# Altium PCB sha2017_rev1_0_0.PcbDoc (part 2 of 2)
Units mil, origin at the board's own origin, x right, y up, seen from the top; angles counter-clockwise.
Board outline 3740.16 x 3385.83 mil, 2 copper layers (Top, Bottom), stack 65.748 mil thick; 201 components, 109 nets, 510 pads, 486 vias.
Unrouted connection lines stored in the file: 20.
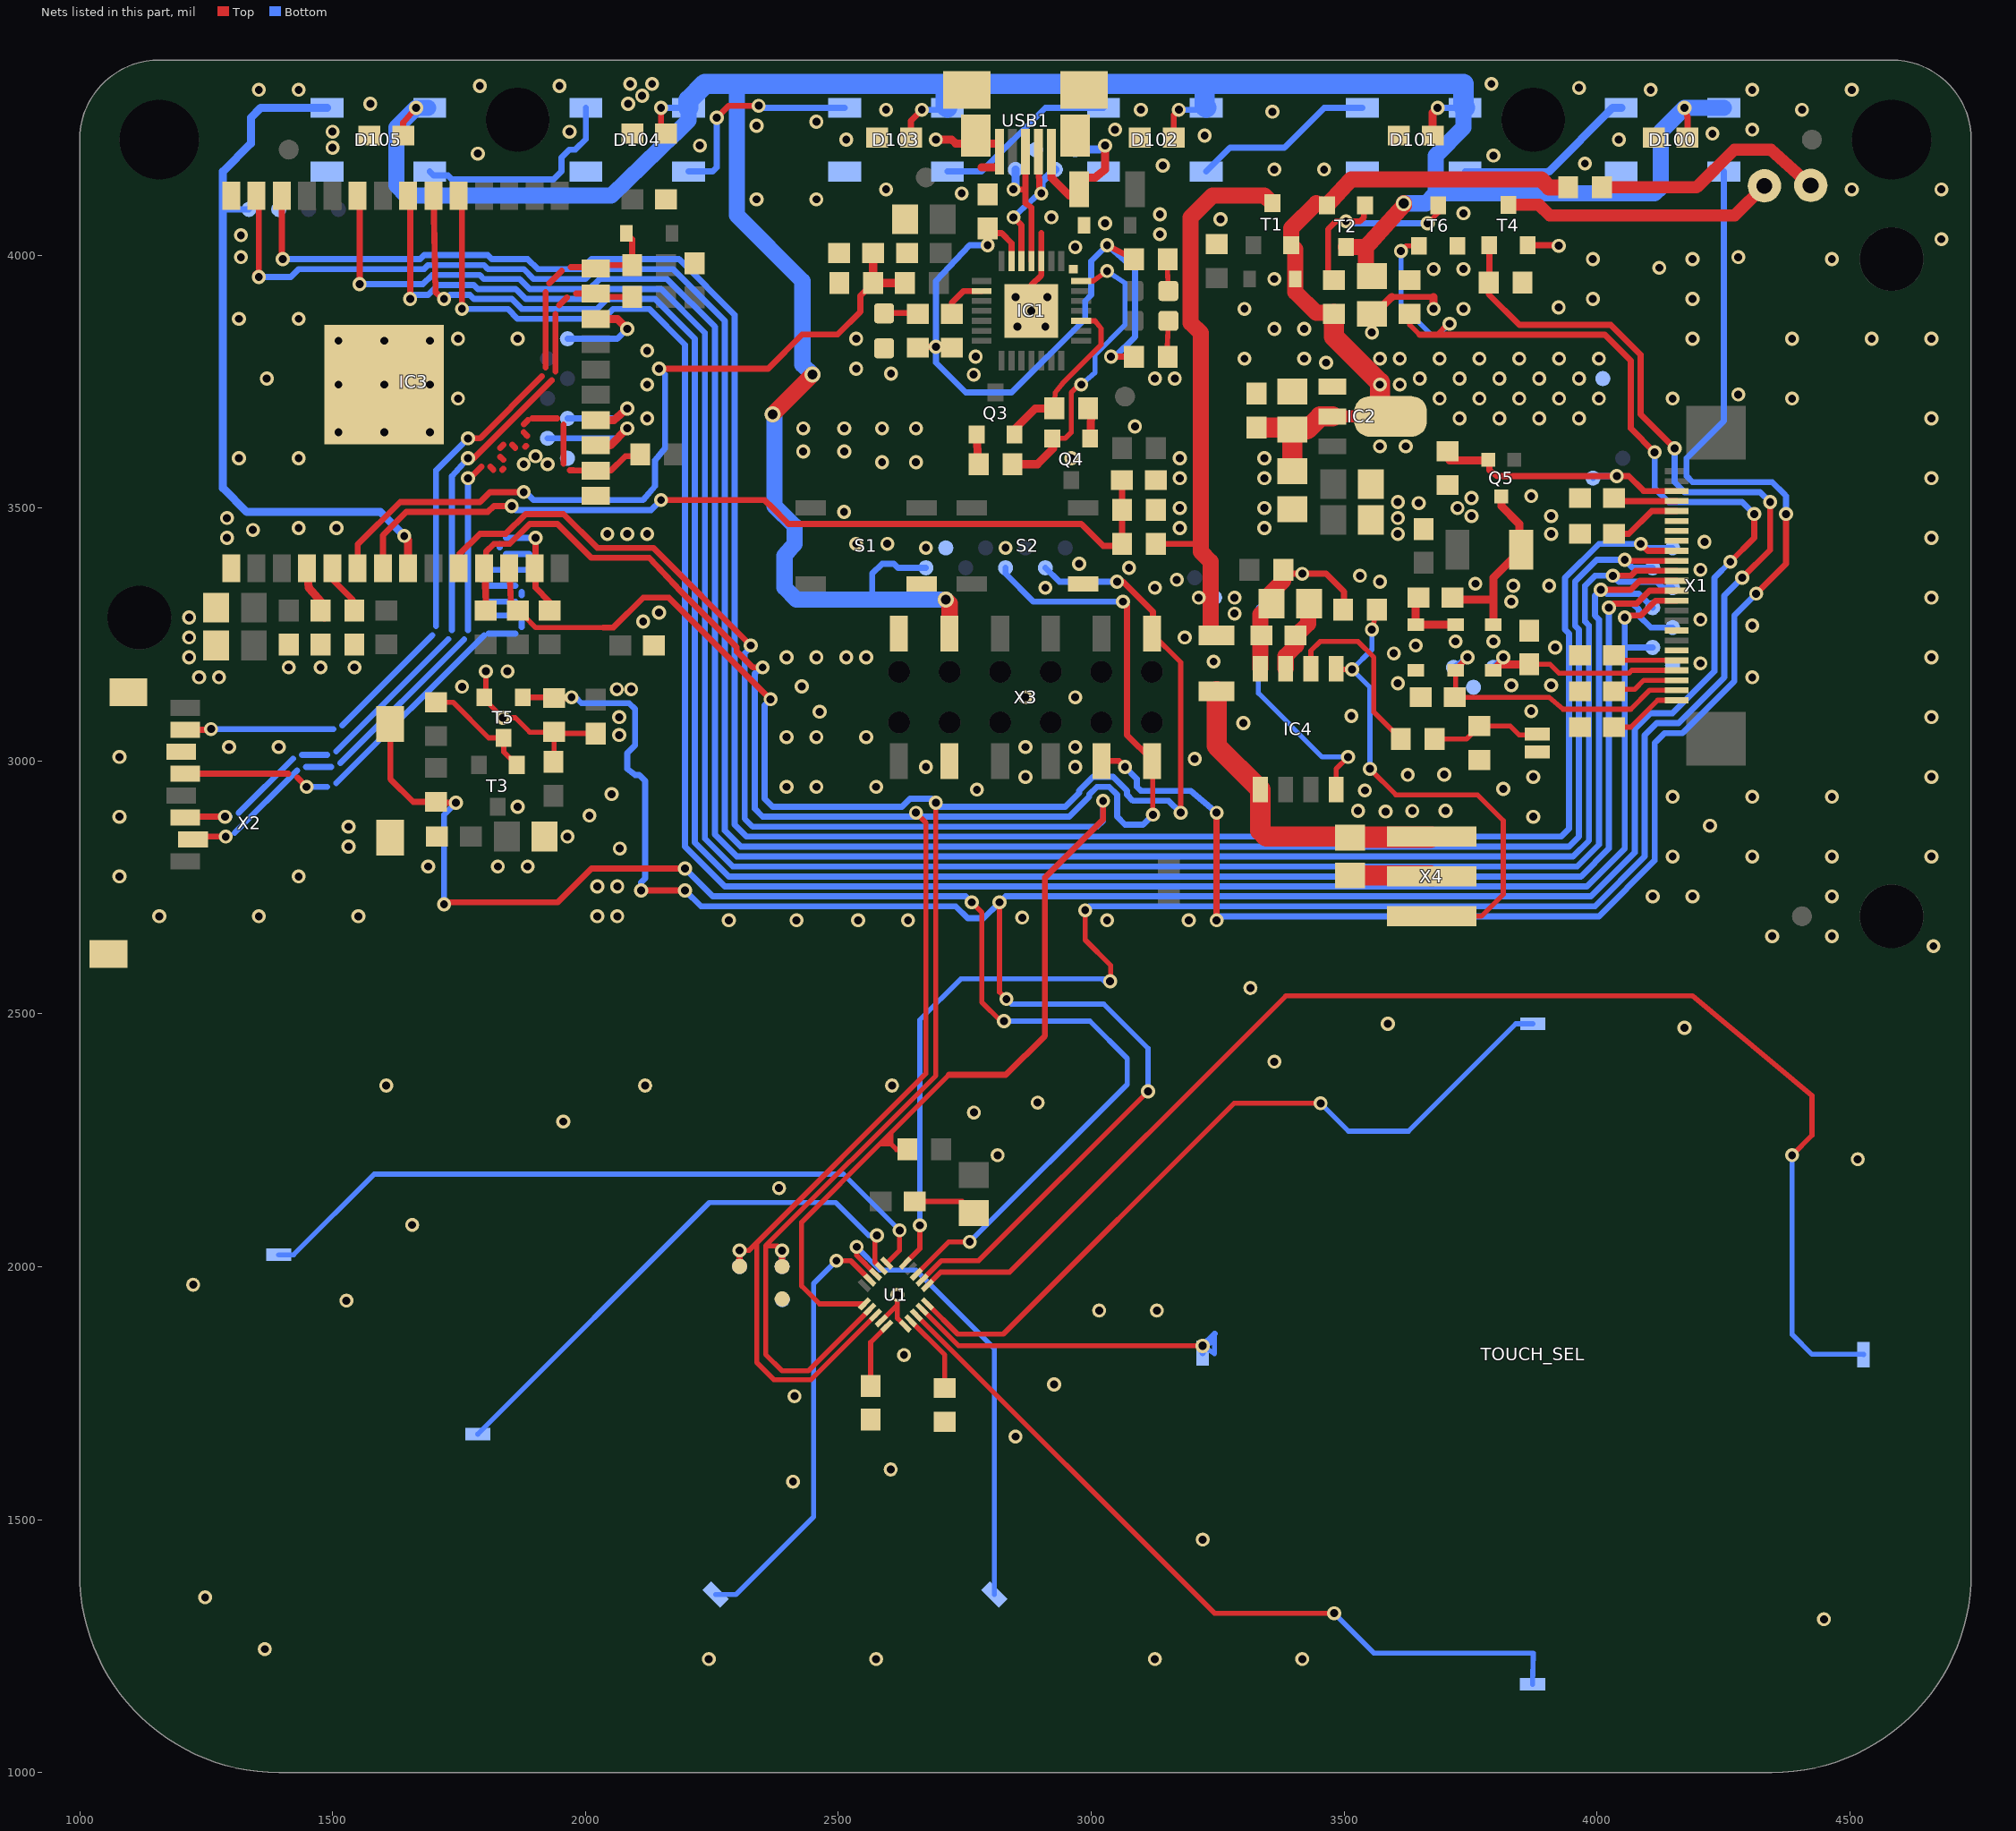
[diagram p2: the nets of this part, all layers, seen from the top]

## Via types
v1: diameter 27.75/27.75 (per signal layer), hole 15.75, Top to Bottom, 479 vias
v2: diameter 31.69/31.69 (per signal layer), hole 19.69, Top to Bottom, 7 vias

## Nets (pads, with @x,y where several pads share a name; then routed paths per layer and width w, separated by ;. In a path a pad name is that pad's centre, name@x,y a point inside that pad or via, vN(x,y) a via of type N, cw(c..) or ccw(c..) an arc to the next point about the centre after c; other vN are vias at no path point) (continued)
GND: $$U$1.P$1 $$U$2.P$1 $$U$3.P$1 $$U$4.P$1 $$U$5.P$1 $$U$6.P$1 $$U$7.P$1 $$U$8.P$1 $$U$9.P$1 C1.1 C2.1 C3.1 C4.1 C5.1 C6.1 C7.2 C8.2 C9.2 C10.2 C11.2 C12.2 C13.2 C14.2 C15.2 C16.2 C17.2 C18.2 C19.1 C20.2 C21.1 C22.2 C23.1 C24.2 C26.2 C27.2 C28.1 C29.1 C30.2 C31.2 C32.1 C33.1 C34.2 C35.1 C36.1 C37.2 C38.1 C39.2 C40.2 C41.2 C43.2 C44.2 C45.2 D1.A D6.C D7.C D100.3 D101.3 D102.3 D103.3 D104.3 D105.3 IC1.3 IC1.EXP IC1.M IC2.1 IC3.0 IC3.1 IC3.15 IC3.38 IC4.3 R4.1 R6.1 R10.2 R11.2 R19.2 R20.1 R27.1 R35.2 R37.1 S1.1 S2.1 SJ3.1 T4.2 T5.2 T6.2 TP1.P$1 TP102.P$1 TP103.P$1 TP106.P$1 TP122.P$1 TP125.P$1 TP135.P$1 TP140.P$1 U1.4 U1.6 U$2.P$1 U$3.P$1 U$4.P$1 U$5.P$1 U$6.P$1 U$10.P$1 U$11.P$1 U$12.P$1 U$13.P$1 U$14.P$1 U$15.P$1 U$16.P$1 U$17.P$1 U$18.P$1 U$19.P$1 U$20.P$1 U$21.P$1 U$22.P$1 U$23.P$1 USB1.5 USB1.GND1 USB1.GND2 USB1.GND3 USB1.GND4 X1.8 X1.17 X2.6 X2.CD2 X2.GND1 X2.GND3 X3.1@2620.08,3251.96 X3.11 X4.2 | length 1458.6
  Top w10: T5.2@1800.5,3125.62 T5.2@1803.15,3128.27 ; v1(1803.15,3177.17) T5.2@1803.15,3128.27 ; C39.2@1937.01,2998.03 1937.99,2999.02 R27.1@1937.99,3057.42 ; C37.2@2020.25,3054.38 1941.03,3054.38 R27.1@1937.99,3057.42 ; U1.4@2585.18,1893.26 2616.88,1924.96 ; $$U$9.P$1@2616.88,1944.45 2616.88,1924.96 ; U1.6@2632.55,1882.65 2616.88,1898.33 2616.88,1924.96 ; C44.2@2650.86,2129.25 2745.08,2129.25 C43.2@2768.14,2106.19 ; T5.2@1803.15,3128.27 1803.15,3119.17 v1(1836.77,3085.55) 1861.32,3085.55 1890,3056.87 1937.45,3056.87 R27.1@1937.99,3057.42
  Top w12: IC1.EXP@2881.89,3940.94 2901.57,3960.63 IC1.3@2901.57,3980.31 ; IC1.3@2901.57,3984.25 2901.57,4043.31 ; 3594.49,3917.32 3677.17,3917.32 ; T4.2@3863.25,4019.37 3923.66,4019.37 v1(3924.65,4018.39)
  Top w16: v1(2692.91,4228.35) 2724.41,4228.35 2732.28,4220.47 2818.9,4220.47 USB1.5@2818.9,4204.72 2818.9,4173.23 2783.46,4173.23 ; C13.2@3555.12,3883.86 3561.02,3883.86 3594.49,3917.32 ; v1(3677.17,3893.7) 3677.17,3917.32
  Top w32: IC4.3@3384.45,3182.48 3384.45,3207.28 3405.51,3228.35 3405.51,3246.06 C23.1@3403.54,3248.03 3405.51,3248.03 3429.13,3271.65 3429.13,3309.06 C24.2@3431.1,3311.02
  Top w40: C34.2@3511.81,2773.62 3671.26,2773.62 X4.2@3673.23,2771.65
  other v1: 2926.55,1767.34 1956.36,2286.99 3362.2,2405.51 4173.23,2472.44 3586.61,2480.31 4665.35,2633.86 4346.46,2653.54 4464.57,2653.54 2283.46,2685.04 2417.32,2685.04 2539.37,2685.04 2637.8,2685.04 3031.5,2685.04 3192.91,2685.04 2863.58,2690.23 1157.48,2692.91 1354.33,2692.91 1551.18,2692.91 2023.62,2692.91 2062.99,2692.91 4110.24,2732.28 4188.98,2732.28 4464.57,2732.28 2023.62,2751.97 2062.99,2751.97 1078.74,2771.65 1433.07,2771.65 1688.98,2791.34 1826.77,2791.34 1885.83,2791.34 4149.61,2811.02 4307.09,2811.02 4464.57,2811.02 4661.42,2811.02 2067.99,2826.95 1531.5,2830.71 1964.57,2850.39 1531.5,2870.08 4223.62,2872.05 1078.74,2889.76 3874.02,2889.76 2007.99,2891.95 3582.28,2900 3635.04,2901.18 3527.56,2901.57 3700.79,2901.57 1866.14,2909.45 4149.61,2929.13 4307.09,2929.13 4464.57,2929.13 2051.74,2934.45 3541.34,2941.73 2774.15,2943.19 3814.96,2944.88 2397.64,2948.82 2456.69,2948.82 2574.8,2948.82 2870.08,2968.5 3874.02,2968.5 4661.42,2968.5 3625.98,2972.44 3698.03,2973.23 2673.23,2988.19 2968.5,2988.19 3204.72,3003.94 1078.74,3007.87 1295.28,3027.56 1393.7,3027.56 2870.08,3027.56 2968.5,3027.56 2397.64,3047.24 2456.69,3047.24 2555.12,3047.24 2066.93,3051.18 3300.79,3074.8 2066.93,3086.61 4661.42,3086.61 3514.57,3088.98 2463.25,3097.24 3870.08,3098.43 2870.08,3125.98 2968.5,3125.98 2062.2,3141.73 2090.55,3141.73 1756.14,3146.68 2427.88,3147.23 3830.71,3149.61 3909.45,3149.61 3606.3,3153.54 1236.22,3165.35 1275.59,3165.35 4307.09,3165.35 1845.9,3177.17 1413.39,3185.04 1476.38,3185.04 1543.31,3185.04 4204.72,3192.91 3242.13,3196.46 1216.54,3204.72 2397.64,3204.72 2456.69,3204.72 2515.75,3204.72 2555.12,3204.72 4661.42,3204.72 3598.43,3212.6 3917.32,3224.41 3641.73,3228.35 3720.47,3236.22 3795.28,3236.22 1216.54,3244.09 3185.04,3244.09 4307.09,3267.72 2114.17,3275.59 4204.72,3279.53 1216.54,3283.46 3283.46,3291.34 2145.67,3293.31 3830.71,3314.96 3283.46,3322.83 4661.42,3322.83 2909.45,3342.52 3125.98,3342.52 3834.65,3346.46 3905.51,3346.46 3759.84,3350.39 3570.87,3354.33 3169.29,3358.27 3531.5,3366.14 4204.72,3377.95 3074.8,3381.89 2976.38,3389.76 2673.23,3421.26 2830.71,3421.26 2535.43,3429.13 2597,3429.39 4212.6,3433.07 1291.34,3440.94 4661.42,3440.94 2043.31,3448.82 2082.68,3448.82 2122.05,3448.82 3606.3,3448.82 3909.45,3448.82 1342.52,3456.69 1433.07,3460.63 1507.87,3460.63 3175.2,3460.63 3342.52,3460.63 1291.34,3480.31 3606.3,3480.31 3751.97,3484.25 3909.45,3484.25 2511.38,3492.51 3175.2,3500 3342.52,3500 3724.41,3500 3647.64,3509.84 3606.3,3511.81 3751.97,3519.69 3870.08,3523.62 3175.2,3559.06 3342.52,3559.06 4661.42,3559.06 1877.95,3586.61 1925.2,3586.61 2586.61,3590.55 2653.54,3590.55 1314.96,3598.43 1433.07,3598.43 2960.63,3598.43 3175.2,3598.43 3342.52,3598.43 1901.57,3602.36 2430.76,3611.8 2511.81,3611.8 1511.81,3649.61 1602.36,3649.61 1692.91,3649.61 2430.76,3657.48 2511.81,3657.48 2586.61,3657.48 2653.54,3657.48 3086.61,3661.42 2122.05,3677.17 4661.42,3677.17 1748.03,3716.54 4149.61,3716.54 4385.83,3716.54 4279.53,3724.41 1511.81,3744.09 1602.36,3744.09 1692.91,3744.09 2122.05,3744.09 1370.08,3755.91 3125.98,3755.91 3165.35,3755.91 2767.72,3763.78 2604.33,3765.75 2535.43,3775.59 3464.57,3787.4 3303.15,3795.28 3421.26,3795.28 2771.65,3799.21 2122.05,3811.02 1511.81,3830.71 1602.36,3830.71 1692.91,3830.71 1748.03,3834.65 1866.14,3834.65 2535.43,3834.65 4188.98,3834.65 4385.83,3834.65 4543.31,3834.65 4661.42,3834.65 3555.12,3847.24 3362.2,3854.33 3421.26,3854.33 2854.33,3858.27 2909.45,3858.27 1314.96,3874.02 1433.07,3874.02 2881.89,3889.76 3303.15,3893.7 3736.22,3893.7 3924.32,3896.51 3992.13,3913.39 4188.98,3913.39 2850.39,3917.32 2913.39,3917.32 3362.2,3952.76 3677.17,3972.44 3736.22,3972.44 4123.4,3974.94 3992.13,3992.13 4188.98,3992.13 4464.57,3992.13 1318.9,3996.06 4279.53,3996.06 2968.5,4015.75 4681.1,4031.5 1318.9,4039.37 3135.83,4041.34 3027.56,4062.99 3255.91,4070.87 2921.26,4074.8 3135.83,4080.71 3736.22,4082.68 2338.58,4110.24 2456.69,4110.24 2744.09,4122.05 2594.49,4129.92 4503.94,4129.92 4681.1,4129.92 3362.2,4169.29 3460.63,4169.29 3141.73,4177.17 3976.38,4181.1 3795.28,4196.85 1787.4,4200.79 1500,4212.6 2226.38,4216.54 2515.75,4228.35 4043.31,4228.35 3224.41,4236.22 4228.35,4240.16 1500,4244.09 1968.5,4244.09 3047.24,4248.03 4307.09,4248.03 2338.58,4255.91 2456.69,4263.78 3358.27,4283.46 2594.49,4287.4 3098.43,4287.4 4405.51,4287.4 1574.8,4299.21 2084.65,4299.21 2112.2,4314.96 1354.33,4326.77 1433.07,4326.77 4106.3,4326.77 4307.09,4326.77 4503.94,4326.77 3964.57,4330.71 1791.34,4334.65 1948.82,4334.65 2088.58,4338.58 2131.89,4338.58 3791.34,4338.58
I2C_INT: IC3.10 R1.1 U1.1 | length 3356.3
  Top w10: U1.1@2551.95,1926.5 2462.87,1926.5 2427.5,1961.87 2427.5,2088.12 2582.5,2243.12 ; 2603.75,2244.37 2603.75,2264.37 ; R1.1@2636.54,2231.87 2615,2231.87 2603.75,2243.12 ; 2718.75,2379.37 2603.75,2264.37 ; 2582.5,2243.12 2593.13,2253.75 ; 2582.5,2243.12 2603.75,2243.12 ; 2593.13,2253.75 2603.75,2264.37 ; 2593.13,2253.75 2603.75,2243.12
  Top w12: IC3.10@1749.6,3381.1 1749.61,3407.09 1791.34,3448.82 1842.52,3448.82 1881.89,3488.19 1956.69,3488.19 2023.62,3421.26 2133.86,3421.26 v1(2326.77,3228.35) ; 2718.75,2379.37 2831.25,2379.37 2908.75,2456.87 2908.75,2769.5 3023.62,2884.37 v1(3023.62,2921.26)
  Bottom w12: v1(2326.77,3228.35) 2326.77,3224.41 2314.96,3212.6 2314.96,2885.83 2330.71,2870.08 3011.81,2870.08 3023.62,2881.89 v1(3023.62,2921.26)
I2C_SCL: IC3.12 R24.2 TP3.P$1 TP100.P$1 TP114.P$1 U1.2 X3.6 | length 4122.9
  Top w10: R24.2@1879.92,3285.43 1901.57,3263.78 2035.43,3263.78 ; v1(2388.86,2031.98) 2379.55,2041.29 2356.25,2041.29 ; U1.2@2562.55,1915.89 2441.03,1794.37 2388.75,1794.37 2356.25,1826.87 2356.25,2041.29 ; v1(2692.91,2917.32) 2692.91,2377.95 2356.25,2041.29 ; X3.6@3120.08,3251.96 3177.17,3194.88 v1(3177.17,2897.64)
  Top w12: IC3.12@1849.6,3381.1 1853.54,3294.09 R24.2@1866.14,3297.24 1879.92,3311.02 R24.2@1879.92,3285.43 ; 2035.43,3263.78 2055.12,3263.78 2114.17,3322.83 2165.35,3322.83 v1(2366.14,3122.05) ; TP3.P$1@2388.86,2000.48 v1(2388.86,2031.98) ; v1(3051.18,3354.33) 3062.99,3354.33 3122.05,3295.28 3122.05,3253.94 X3.6@3120.08,3251.96
  Bottom w12: v1(2366.14,3122.05) 2354.33,3110.24 2354.33,2925.2 2370.08,2909.45 2625.98,2909.45 2641.73,2925.2 2685.04,2925.2 v1(2692.91,2917.32) 2700.79,2909.45 2948.82,2909.45 2976.38,2937.01 2976.38,2940.94 3003.94,2968.5 3043.31,2968.5 3070.87,2940.94 3070.87,2933.07 3082.68,2921.26 3153.54,2921.26 v1(3177.17,2897.64) ; TP100.P$1@2388.86,2000.48 v1(2388.86,2031.98) ; TP114.P$1@2909.45,3381.89 2937.01,3354.33 v1(3051.18,3354.33)
I2C_SDA: IC3.11 R23.2 TP2.P$1 TP101.P$1 TP115.P$1 U1.3 X3.7 | length 4439.2
  Top w10: v1(2304.88,2032.25) 2323.59,2032.25 2338.75,2047.41 ; U1.3@2573.86,1904.57 2446.16,1776.87 2372.5,1776.87 2338.75,1810.62 2338.75,2047.41 ; v1(2653.54,2897.64) 2673.23,2877.95 2673.23,2381.89 2338.75,2047.41 ; X3.7@3120.08,3000 3122.05,2998.03 v1(3122.05,2893.7)
  Top w12: IC3.11@1799.6,3381.1 R23.2@1803.54,3297.64 ; R23.2@1803.15,3297.24 R23.2@1803.54,3297.64 ; IC3.11@1803.15,3397.64 IC3.11@1803.54,3397.24 ; TP2.P$1@2304.88,2000.76 v1(2304.88,2032.25) ; v1(2350.39,3185.04) 2330.71,3185.04 2299.21,3216.54 2299.21,3224.41 2188.98,3334.65 2125.98,3401.57 2011.81,3401.57 1944.88,3468.5 1889.76,3468.5 1850.39,3429.13 1818.9,3429.13 1803.54,3413.78 IC3.11@1803.54,3397.24 ; v1(3062.99,3314.96) 3070.87,3307.09 3070.87,3051.18 3120.08,3001.97 X3.7@3120.08,3000 ; R23.2@1803.54,3297.64 IC3.11@1803.54,3397.24
  Bottom w12: TP101.P$1@2304.88,2000.76 v1(2304.88,2032.25) ; v1(2350.39,3185.04) 2346.46,3185.04 2334.65,3173.23 2334.65,2905.51 2350.39,2889.76 2641.73,2889.76 ; v1(2653.54,2897.64) 2649.61,2897.64 2641.73,2889.76 ; TP115.P$1@2830.71,3381.89 2830.71,3370.08 2885.83,3314.96 v1(3062.99,3314.96) ; v1@3118.11,2889.76 v1(3122.05,2893.7) 3102.36,2874.02 3066.93,2874.02 3051.18,2889.76 3051.18,2933.07 3035.43,2948.82 3011.81,2948.82 2996.06,2933.07 2996.06,2929.13 2956.69,2889.76 2641.73,2889.76
LCD_!RESET: IC3.37 TP113.P$1 X1.15 | length 4671
  Top w12: IC3.37@1349.6,4117.32 1354.33,4112.6 v1(1354.33,3956.69) v1@1353.54,3957.48 ; v1(4055.12,3397.64) 4055.12,3395.67 X1.15@4157.48,3395.67
  Top w16: v1@1349.61,3961.42 v1(1354.33,3956.69)
  Bottom w12: v1(1354.33,3956.69) 1417.32,3956.69 1433.07,3972.44 1681.1,3972.44 1688.98,3980.31 1799.21,3980.31 1807.09,3972.44 1877.95,3972.44 1897.64,3952.76 2000,3952.76 2019.69,3972.44 2173.23,3972.44 2267.72,3877.95 2275.59,3870.08 2275.59,3854.33 2275.59,2862.2 2307.09,2830.71 3944.88,2830.71 3964.57,2850.39 3964.57,3259.84 3956.69,3267.72 3956.69,3354.33 4000,3397.64 v1(4055.12,3397.64) 4070.87,3381.89 TP113.P$1@4110.24,3381.89
LCD_BUSY: IC3.36 TP118.P$1 X1.16 | length 4601
  Top w12: v1@1399.61,3994.09 IC3.36@1399.6,4117.32 ; v1(1401.57,3992.13) v1@1403.54,3990.16 ; 4098.43,3417.32 v1(4086.61,3429.13) 4100.39,3415.35 X1.16@4157.48,3415.36
  Top w16: v1@1399.61,3994.09 v1(1401.57,3992.13)
  Bottom w12: v1(1401.57,3992.13) 1673.23,3992.13 1681.1,4000 1807.09,4000 1814.96,3992.13 1885.83,3992.13 1905.51,3972.44 1992.13,3972.44 2011.81,3992.13 2185.04,3992.13 2295.28,3881.89 2295.28,2874.02 2318.9,2850.39 3929.13,2850.39 3944.88,2866.14 3944.88,3251.97 3937.01,3259.84 3937.01,3362.2 4003.94,3429.13 v1(4086.61,3429.13) 4094.49,3421.26 TP118.P$1@4149.61,3421.26
LCD_CS: IC3.31 TP109.P$1 X1.13 | length 4456.7
  Top w12: IC3.31@1649.6,4117.32 1653.54,4113.39 v1(1653.54,3913.39) ; v1(4007.87,3338.58) 4066.93,3338.58 4084.65,3356.3 4086.61,3356.3 X1.13@4157.48,3356.3
  Bottom w12: v1(1653.54,3913.39) 1661.42,3921.26 1688.98,3921.26 1708.66,3940.94 1779.53,3940.94 1787.4,3933.07 1862.2,3933.07 1881.89,3913.39 2015.75,3913.39 2035.43,3933.07 2149.61,3933.07 2236.22,3846.46 2236.22,2846.46 2291.34,2791.34 3960.63,2791.34 4003.94,2834.65 4003.94,3279.53 3996.06,3287.4 3996.06,3326.77 v1(4007.87,3338.58) ; TP109.P$1@4110.24,3303.15 4094.49,3318.9 4082.68,3330.71 4019.69,3330.71 v1(4007.87,3338.58) ; v1(4007.87,3338.58) 4007.87,3342.52 v1(4007.87,3338.58)
LCD_D/!S: IC3.33 TP111.P$1 X1.14 | length 4536.7
  Top w12: IC3.33@1549.6,4117.32 1553.54,4113.39 v1(1553.54,3942.52) ; v1(4031.5,3366.14) 4066.93,3366.14 4076.77,3375.98 4078.74,3375.98 X1.14@4157.48,3375.99
  Bottom w12: v1(1553.54,3942.52) 1678.74,3942.52 1696.85,3960.63 1791.34,3960.63 1799.21,3952.76 1870.08,3952.76 1889.76,3933.07 2007.87,3933.07 2027.56,3952.76 2161.42,3952.76 2255.91,3858.27 2255.91,2854.33 2299.21,2811.02 3952.76,2811.02 3984.25,2842.52 3984.25,3267.72 3976.38,3275.59 3976.38,3346.46 3996.06,3366.14 v1(4031.5,3366.14) 4043.31,3354.33 4118.11,3354.33 4129.92,3342.52 TP111.P$1@4149.61,3342.52
LCD_MOSI: IC3.29 TP107.P$1 X1.11 | length 4257.5
  Top w12: IC3.29@1749.6,4117.32 1755.91,4111.02 v1(1755.91,3893.7) v1@1753.54,3896.06 ; v1(4055.12,3283.46) 4062.99,3287.4 4086.61,3287.4 4116.14,3316.93 4118.11,3316.93 X1.11@4157.48,3316.93
  Bottom w12: v1(1755.91,3893.7) 1846.46,3893.7 1866.14,3874.02 1870.08,3874.02 2035.43,3874.02 2055.12,3893.7 2125.98,3893.7 2196.85,3822.83 2196.85,2830.71 2275.59,2751.97 3980.32,2751.97 4055.12,2826.77 4055.12,3224.41 ; v1(4055.12,3283.46) 4055.12,3224.41 ; TP107.P$1@4110.24,3224.41 4055.12,3224.41
LCD_SCK: IC3.30 TP108.P$1 X1.12 | length 4396.7
  Top w12: IC3.30@1699.6,4117.32 1703.54,3926.38 v1(1720.47,3913.39) ; v1(4023.62,3303.15) 4031.5,3311.02 4078.74,3311.02 4104.33,3336.61 X1.12@4157.48,3336.62
  Bottom w12: v1(1720.47,3913.39) 1728.35,3917.32 1732.28,3921.26 1771.65,3921.26 1779.53,3913.39 1854.33,3913.39 1874.02,3893.7 1881.89,3893.7 2023.62,3893.7 2043.31,3913.39 2137.8,3913.39 2216.54,3834.65 2216.54,2838.58 2283.46,2771.65 3968.5,2771.65 4023.62,2826.77 v1(4023.62,3303.15) 4031.5,3311.02 4070.87,3311.02 4082.68,3299.21 4082.68,3287.4 4106.3,3263.78 TP108.P$1@4149.61,3263.78
N$1: TOUCH_A.P$1 U1.16 | length 1415
  Top w10: U1.16@2595.79,2007.11 2621.25,2032.57 v1(2621.25,2071.87)
  Bottom w10: TOUCH_A.P$1@1393.7,2023.62 1423,2023.62 1582.5,2183.12 2510,2183.12 v1(2621.25,2071.87)
N$2: D100.4 D101.2 | length 361.1
  Bottom w12: D101.2@3739.25,4165.35 3905.51,4165.35
  Bottom w16: 3905.51,4165.35 4031.5,4291.34 D100.4@4048.15,4291.34
N$3: D103.4 D104.2 | length 424.3
  Top w12: v1(2259.84,4271.65) 2283.46,4295.28 v1(2342.52,4295.28)
  Bottom w12: D104.2@2203.82,4165.36 2251.97,4165.35 2259.84,4173.23 v1(2259.84,4271.65) ; v1(2342.52,4295.28) 2342.52,4291.34 D103.4@2512.71,4291.34
N$4: D104.4 D105.2 | length 426.6
  Bottom w12: D105.2@1692.01,4165.36 1699.88,4157.48 1728.35,4157.48 1736.22,4149.61 1755.91,4149.61 1937.01,4149.61 1952.76,4165.35 1952.76,4192.91 1968.5,4208.66 1980.32,4208.66 2000.91,4229.25 D104.4@2000.9,4291.34
N$5: 
N$6: TOUCH_START.P$1 U1.19 | length 864.4
  Top w10: v1(2496.25,2011.87) 2524.56,2011.87 U1.19@2562.55,1973.87
  Bottom w10: TOUCH_START.P$1@2257.45,1351.94 2297.57,1351.94 2451.25,1505.62 2451.25,1966.87 v1(2496.25,2011.87)
N$7: IC4.2 R29.1 | length 364.1
  Top w10: IC4.2@3434.45,3182.48 3434.45,3217.91 3452.76,3236.22 3527.56,3236.22 3559.06,3204.72 3559.06,3096.46 R29.1@3612.21,3043.31
N$8: IC1.9 R13.2 | length 90.5
  Top w12: R13.2@2724.41,3883.86 2724.41,3905.51 2748.03,3929.13 IC1.9@2783.46,3929.13
N$9: R29.2 R35.1 SJ3.2 | length 221.5
  Top w10: R29.2@3679.13,3043.31 3742.13,3043.31 R35.1@3767.72,3068.89 3828.74,3068.9 3846.46,3051.18 3879.92,3051.18 SJ3.2@3881.89,3053.15
N$10: IC1.24 Q3.2 R15.1 | length 346.4
  Top w10: R15.1@2927.17,3696.85 2929.13,3728.35 2944.88,3748.03 3019.69,3822.83 3019.69,3854.33 3007.87,3870.08 IC1.24@2980.32,3870.07
  Top w16: Q3.2@2848.42,3645.67 2850.39,3657.48 2889.76,3696.85 R15.1@2927.17,3696.85
N$11: IC1.28 Q4.2 R18.1 | length 598.8
  Top w10: Q4.2@2923.23,3637.8 2948.82,3637.8 2960.63,3649.61 2960.63,3728.35 2976.38,3744.09 v1(2980.32,3744.09) ; IC1.28@2980.32,3948.82 3003.94,3948.82 v1(3031.5,3968.5)
  Top w16: R18.1@2844.48,3586.61 2893.7,3586.61 2925.2,3618.11 Q4.2@2923.23,3637.8
  Bottom w10: v1(2980.32,3744.09) 3007.87,3767.72 3007.87,3803.15 3066.93,3862.2 3066.93,3944.88 v1(3031.5,3968.5)
N$12: C23.2 C24.1 IC4.4 IC4.8 R30.2 R32.2 | length 1019.9
  Top w10: R30.2@3379.92,3377.95 3387.8,3370.08 v1(3417.32,3370.08) ; IC4.8@3484.45,2943.5 3484.45,2984.45 v1(3507.87,3007.87)
  Top w12: R30.2@3381.89,3370.08 v1(3417.32,3370.08) 3464.57,3370.08 3500,3334.65 3500,3301.18 R32.2@3498.04,3299.21
  Top w32: IC4.4@3334.45,3182.48 3334.65,3182.68 C23.2@3334.65,3244.09 ; C23.2@3336.62,3248.03 C23.2@3334.65,3244.09 ; R30.2@3379.92,3377.95 R30.2@3379.92,3368.11 ; R30.2@3381.89,3370.08 R30.2@3379.92,3368.11 ; C23.2@3334.65,3244.09 3334.65,3289.37 C24.1@3356.3,3311.02 3354.33,3312.99 3354.33,3330.71 3379.92,3356.3 R30.2@3379.92,3368.11
  Bottom w10: v1(3417.32,3370.08) 3397.64,3370.08 3330.71,3303.15 3330.71,3133.86 3456.69,3007.87 v1(3507.87,3007.87)
N$13: Q4.1 R15.2 | length 60.5
  Top w16: R15.2@2994.09,3696.85 3000,3685.04 Q4.1@2998.03,3637.8
N$14: Q3.1 R18.2 | length 59.2
  Top w16: Q3.1@2773.62,3645.67 2775.59,3610.24 R18.2@2777.56,3586.61
N$16: M1.- T4.1 | length 538.5
  Top w24: T4.1@3825.25,4099.37 3885.62,4099.37 3906.25,4078.74 4272.83,4078.74 M1.-@4331.1,4137
N$17: R28.1 T3.1 T5.1 | length 227.1
  Top w10: R28.1@1704.72,3116.14 1738.23,3116.14 1808.75,3045.62 T5.1@1838.5,3045.62 1838.5,3017.8 T3.1@1864.17,2992.13
N$18: M1.+ R2.1 | length 471.2
  Top w24: R2.1@4009.84,4133.86 4196.85,4133.86 4271.65,4208.66 4344.09,4208.66 M1.+@4422.83,4137.79
N$19: D101.4 D102.2 | length 361.1
  Bottom w12: D102.2@3227.44,4165.36 3274.69,4212.6 3381.89,4212.6 3460.63,4291.34 D101.4@3536.34,4291.34
N$20: C45.1 U1.5 | length 131.4
  Top w10: C45.1@2563.92,1764.41 2563.92,1850.79 U1.5@2595.79,1882.65
N$21: R37.2 U1.7 | length 160.8
  Top w10: U1.7@2643.16,1893.26 2710.58,1825.85 R37.2@2710.58,1760.39
N$22: C25.1 D7.A D8.C | length 112.2
  Top w16: C25.1@3641.73,3303.15 3641.73,3271.65 D7.A@3641.73,3269.69 D8.C@3720.47,3269.69
N$23: C25.2 D9.A L1.2 Q5.3 | length 373.5
  Top w16: C25.2@3714.56,3322.83 3724.41,3318.9 3795.28,3318.9 ; D9.A@3795.28,3269.69 3795.28,3318.9 ; Q5.3@3811.02,3522.64 3811.02,3503.94 3846.46,3468.5 3846.46,3421.26 L1.2@3850.39,3417.32 3795.28,3362.2 3795.28,3318.9
N$24: TOUCH_B.P$1 U1.17 | length 1077.5
  Top w10: v1(2576.25,2061.87) 2572.5,2058.12 2572.5,2009.18 U1.17@2585.18,1996.5
  Bottom w10: TOUCH_B.P$1@1787.4,1669.29 2244.98,2126.87 2495,2126.87 2560,2061.87 v1(2576.25,2061.87)
N$25: TOUCH_SEL.L U1.11 | length 2715.7
  Top w10: U1.11@2676.4,1963.26 2702.5,1989.37 2838.75,1989.37 3384.81,2535.43 3570,2535.43 ; 3559.06,2535.43 3570,2535.43 ; v1(4385.83,2220.47) 4425.2,2259.84 4425.2,2338.58 4188.98,2535.43 3570,2535.43
  Bottom w10: v1(4385.83,2220.47) 4385.83,1866.14 4425.2,1826.77 4527.56,1826.77 TOUCH_SEL.L@4527.17,1825.98
N$26: D6.A R12.1 | length 75.3
  Top w10: R12.1@2657.48,3883.86 R12.1@2661.42,3885.83
  Top w12: D6.A@2590.55,3884.92 R12.1@2661.42,3885.83
N$27: D4.A R3.1 | length 71.4
  Top w10: R3.1@3151.57,3992.13 3149.61,3996.06 D4.A@3152.64,3929.13
N$28: D5.A R14.1 | length 72.9
  Top w10: R14.1@3151.57,3799.21 3149.61,3799.21 D5.A@3152.64,3870.08
N$29: 
N$30: 
N$31: 
N$32: F1.1 TP139.P$1 USB1.1 | length 308.7
  Top w16: USB1.1@2921.26,4204.72 2921.26,4153.54 2956.69,4118.11 F1.1@2976.38,4129.92 2984.25,4137.8 2984.25,4153.54 3007.87,4153.54 3027.56,4169.29 v1(3027.56,4216.54)
  Bottom w16: TP139.P$1@2968.5,4208.66 3015.75,4208.66 v1(3027.56,4216.54)
N$33: 
N$34: 
N$35: 
N$36: 
N$37: 
N$38: 
N$39: 
N$40: 
N$41: 
N$42: C28.2 IC3.4 | length 109.7
  Top w16: IC3.4@1449.6,3381.1 1452.76,3342.52 1484.25,3307.09 C28.2@1484.25,3283.46
N$43: C29.2 IC3.5 | length 102
  Top w12: IC3.5@1499.6,3381.1 1499.61,3358.66 1539.37,3318.9 1539.37,3301.18 C29.2@1543.31,3297.24
N$44: TOUCH_SEL.D U1.8 | length 1558.2
  Top w10: U1.8@2654.48,1904.57 3244.09,1314.96 v1(3480.32,1314.96)
  Bottom w10: v1(3480.32,1314.96) 3559.06,1236.22 3874.02,1236.22 TOUCH_SEL.D@3872.84,1174.41
N$46: TOUCH_SELECT.P$1 U1.18 | length 911.8
  Top w10: v1(2536.25,2039.37) 2536.25,2022.8 U1.18@2573.86,1985.19
  Bottom w10: v1(2536.25,2039.37) 2582.5,1993.12 2653.75,1993.12 2808.64,1838.23 TOUCH_SELECT.P$1@2808.63,1351.94
N$47: TOUCH_SEL.UP U1.10 | length 1521.2
  Top w10: U1.10@2676.4,1926.5 2736.03,1866.87 2826.25,1866.87 3282.5,2323.12 v1(3453.75,2323.12)
  Bottom w10: v1(3453.75,2323.12) 3508.75,2268.12 3627.5,2268.12 3839.69,2480.31 TOUCH_SEL.UP@3873.23,2480.31
N$49: C34.1 F2.1 IC4.5 X4.3 | length 817.2
  Top w40: F2.1@3248.03,3137.79 3248.03,3029.92 IC4.5@3334.45,2943.5 3334.45,2862.4 3346.46,2850.39 X4.3@3673.23,2850.39 3671.26,2848.43 C34.1@3511.81,2848.42
N$50: D102.4 D103.2 | length 361.1
  Bottom w12: D103.2@2715.63,4165.36 2783.46,4165.35 2909.45,4291.34 D102.4@3024.52,4291.34
N$53: R9.1 T2.1 T6.1 | length 428.6
  Top w10: v1(3665.35,4062.99) 3686.5,4084.14 T6.1@3686.5,4098.12
  Top w12: R9.1@3474.41,3956.69 R9.1@3480.32,3950.78 3468.5,3966.54 3468.5,4051.18 3484.25,4066.93 v1(3503.94,4066.93) 3531.5,4066.93 3539.37,4074.8 3539.37,4100.39 T2.1@3541.34,4098.43
  Bottom w12: v1(3503.94,4066.93) 3507.87,4062.99 v1(3665.35,4062.99)
N$56: TOUCH_SEL.R U1.9 | length 725.5
  Top w10: U1.9@2665.79,1915.89 2737.59,1844.09 v1(3220.47,1844.09)
  Bottom w10: 3244.09,1867.72 3244.09,1852.76 ; 3244.09,1852.76 v1(3220.47,1843.21) 3240.16,1830.71 3244.09,1828.35 3244.09,1852.76
  Bottom w12: TOUCH_SEL.R@3220.48,1829.13 v1(3220.47,1843.21) v1(3220.47,1844.09) 3244.09,1867.72
PERIPHERAL_POWER_EN: R10.1 R27.2 T5.3 T6.3 U1.12 | length 5946.2
  Top w10: U1.12@2665.79,1973.87 2703.79,2011.87 2777.5,2011.87 v1(3112.5,2346.87) ; v1(2818.9,2720.47) 2818.9,2542.97 v1(2832.5,2529.37) ; v1(3612.5,4008.12) 3622.5,4018.12 T6.3@3648.5,4018.12 ; R10.1@3629.92,3883.86 3629.92,3862.2 3649.61,3842.52 ; 3683.75,3842.52 3705.6,3864.37 v1(3708.75,3864.37)
  Top w12: T5.3@1876.5,3125.62 1936.71,3125.62 R27.2@1937.99,3124.34 1970.89,3124.34 v1(1972.54,3125.98) ; v1(2110.24,2744.09) v1(2196.85,2744.09) ; 3649.61,3842.52 3683.75,3842.52 4015.75,3842.52 4066.93,3791.34 4066.93,3657.48 v1(4114.17,3610.24) ; v1(4263.78,3393.7) 4311.02,3440.94 v1(4311.02,3488.19)
  Bottom w10: v1(2832.5,2529.37) 2842.5,2519.37 3025,2519.37 3112.5,2431.87 v1(3112.5,2346.87) ; v1(3612.5,4008.12) 3612.5,3902.52 3672.5,3842.52 3686.9,3842.52 v1(3708.75,3864.37)
  Bottom w12: v1(1972.54,3125.98) 1980.32,3125.98 1992.13,3114.17 2086.61,3114.17 2098.43,3102.36 2098.43,3031.5 2082.68,3015.75 2082.68,2984.25 2098.43,2972.44 2106.3,2972.44 2118.11,2960.63 2118.11,2767.72 2110.24,2759.84 v1(2110.24,2744.09) ; v1(2196.85,2744.09) 2228.35,2712.6 2732.28,2712.6 2755.91,2688.98 2787.4,2688.98 v1(2818.9,2720.47) 2830.71,2732.28 3988.19,2732.28 4074.8,2818.9 4074.8,3062.99 4106.3,3094.49 4149.61,3094.49 4232.28,3177.17 4232.28,3362.2 v1(4263.78,3393.7) ; v1(4114.17,3610.24) 4114.17,3539.37 4141.73,3511.81 4287.4,3511.81 v1(4311.02,3488.19)
PREVGH: C32.2 D9.C TP104.P$1 X1.4 | length 437
  Top w10: C32.2@3866.14,3190.94 3907.48,3190.94 3925.2,3173.23 4062.99,3173.23 4068.9,3179.13 X1.4@4157.48,3179.14
  Top w12: D9.C@3795.28,3179.13 v1(3814.96,3204.72)
  Top w16: D9.C@3795.28,3179.13 3807.09,3190.94 C32.2@3866.14,3190.94
  Bottom w12: TP104.P$1@3795.28,3185.04 v1(3814.96,3204.72)
PREVGL: C36.2 D8.A TP105.P$1 X1.2 | length 585.5
  Top w10: D8.A@3720.47,3179.13 3720.47,3129.92 C36.2@3718.5,3125.98 3905.51,3125.98 3933.07,3102.36 4066.93,3102.36 4104.33,3139.76 X1.2@4157.48,3139.77
  Top w12: D8.A@3720.47,3179.13 v1(3744.09,3204.72)
  Bottom w12: TP105.P$1@3716.54,3185.04 v1(3744.09,3204.72)
RESE: Q5.2 R19.1 TP123.P$1 X1.22 | length 565.4
  Top w12: Q5.2@3785.43,3595.48 3787.4,3598.43 3787.4,3574.8 3803.15,3562.99 v1@4031.5,3562.99 ; X1.22@4157.48,3533.47 4092.52,3533.46 4090.55,3535.43 4062.99,3562.99 v1(4039.37,3562.99) ; v1@4031.5,3562.99 v1(4039.37,3562.99) ; v1@4031.5,3562.99 v1(4039.37,3562.99)
  Top w16: R19.1@3704.72,3612.2 3708.66,3602.36 3708.66,3594.49 3771.65,3594.49 Q5.2@3785.43,3595.48
  Bottom w12: TP123.P$1@3992.13,3559.06 3996.06,3562.99 v1(4039.37,3562.99)
SD1: IC3.22 TP132.P$1 | length 196.6
  Top w16: IC3.22@2020.47,3874.02 2062.99,3874.02 v1(2082.68,3854.33)
  Bottom w12: TP132.P$1@1964.57,3834.65 2062.99,3834.65 v1(2082.68,3854.33)
SD2: IC3.17 TP126.P$1 | length 241.7
  Top w16: IC3.17@2020.47,3624.02 2049.21,3624.02 v1(2082.68,3657.48)
  Bottom w12: TP126.P$1@1925.2,3637.8 2062.99,3637.8 v1(2082.68,3657.48)
SD3: IC3.18 TP127.P$1 | length 196.9
  Top w16: IC3.18@2020.47,3674.02 2055.91,3674.02 v1(2082.68,3696.85)
  Bottom w12: TP127.P$1@1964.57,3677.17 2062.99,3677.17 v1(2082.68,3696.85)
SD_CD: R31.2 U1.13 X2.CD1 | length 2731.4
  Top w10: U1.13@2654.48,1985.19 2718.66,2049.37 v1(2760,2049.37) ; v1(2763.78,2720.47) 2783.75,2700.5 2783.75,2523.12 2821.25,2485.62 v1(2827.5,2485.62)
  Top w12: X2.CD1@1614.17,3072.83 1614.17,2964.57 1659.45,2919.29 R31.2@1704.72,2919.3 1706.69,2917.32 v1(1744.09,2917.32) ; v1(1720.47,2716.54) 1724.41,2720.47 1944.88,2720.47 2011.81,2787.4 v1(2196.85,2787.4)
  Bottom w10: v1(2760,2049.37) 3071.25,2360.62 3071.25,2411.87 2997.5,2485.62 v1(2827.5,2485.62)
  Bottom w12: v1(1720.47,2716.54) 1720.47,2893.7 v1(1744.09,2917.32) ; v1(2196.85,2787.4) 2251.97,2732.28 2751.97,2732.28 v1(2763.78,2720.47)
SD_CLK: IC3.13 R25.1 X2.5 | length 1306.2
  Top w12: X2.5@1208.66,2974.8 1412.48,2974.8 ; 1430.16,2967.48 v1(1448.82,2948.82) ; v1(1901.57,3440.94) 1901.57,3383.07 IC3.13@1899.6,3381.1 1901.57,3379.13 1901.57,3342.52 1929.13,3314.96 R25.1@1929.13,3297.24
  Bottom w12: v1(1448.82,2948.82) 1489.64,2948.82 ; 1507.32,2956.14 1799.49,3248.31 ; 1795.28,3299.9 1795.28,3302.46 ; 1795.28,3358.96 1795.28,3365.45 ; 1807.78,3287.4 1861.52,3287.4 ; 1807.78,3314.96 1861.52,3314.96 ; 1807.78,3346.46 1861.52,3346.46 ; 1807.78,3377.95 1888.52,3377.95 1889.07,3377.95 ; 1830.71,3421.95 1830.71,3428.44 ; 1834.65,3251.97 1808.33,3251.97 1842.52,3251.97 1861.52,3251.97 ; 1843.21,3409.45 1889.07,3409.45 ; 1843.21,3440.94 v1(1901.57,3440.94) ; 1874.02,3264.47 1874.02,3265.02 1874.02,3274.9 ; 1874.02,3327.46 1874.02,3333.96 ; 1901.57,3390.45 1901.57,3396.95
SD_CMD: IC3.23 R8.1 X2.3 | length 1430.4
  Top w12: X2.3@1212.46,2889.76 v1(1287.4,2889.76) ; v1(1767.72,3598.43) 1779.53,3598.43 1933.62,3752.52 ; 1940.94,3770.2 1940.94,3883.35 ; 1948.27,3901.02 1963.94,3916.69 ; 1981.62,3924.02 IC3.23@2020.47,3924.02 2027.17,3917.32 R8.1@2092.52,3917.32
  Bottom w12: v1(1287.4,2889.76) v1@1296.73,2889.76 ; 1314.41,2897.09 1421.81,3004.49 ; 1439.49,3011.81 1489.64,3011.81 ; 1507.32,3019.13 1728.9,3240.71 ; 1736.22,3258.39 1736.22,3543.31 1736.22,3562.99 v1(1767.72,3598.43)
SD_DATA0: D2.A IC3.24 R5.1 X2.7 | length 1512.3
  Top w12: X2.7@1208.66,3061.41 v1@1256.04,3061.42 ; v1(1767.72,3637.8) 1791.34,3637.8 1913.94,3760.39 ; 1921.26,3778.07 1921.26,3926.65 ; 1928.58,3944.33 1953.31,3969.06 ; 1970.99,3976.38 2018.11,3976.38 IC3.24@2020.47,3974.02 2026.77,3980.31 R5.1@2092.52,3980.31 2092.52,4031.5 D2.A@2080.7,4043.31
  Bottom w12: v1(1259.84,3062.99) 1501.46,3062.99 ; 1519.13,3070.31 1697.4,3248.58 ; 1704.72,3266.26 1704.72,3574.8 v1(1767.72,3637.8)
SD_DATA3: IC3.16 R17.1 X2.2 | length 1305.4
  Top w12: X2.2@1224.41,2844.88 X2.2@1232.2,2844.88 ; X2.2@1237.72,2850.39 v1(1288.86,2850.39) ; v1(1767.72,3559.06) 1771.65,3559.06 1794.31,3581.71 ; 1811.99,3581.71 1817.93,3575.77 ; 1831.67,3601.4 1837.62,3595.45 ; 1831.67,3619.08 1837.62,3625.02 ; 1835.61,3575.77 1837.62,3577.78 ; 1855.3,3625.02 1861.24,3619.08 ; 1877.95,3649.61 1884.86,3642.7 ; 1878.5,3665.91 1886.1,3673.5 ; 1880.93,3621.08 1882.85,3623.01 ; 1894.94,3677.17 1944.19,3677.17 ; 1956.69,3587.3 1956.69,3664.67 ; 1969.19,3574.8 1976.38,3574.8 IC3.16@2020.47,3574.02 2050.39,3574.02 2078.74,3602.36 2104.33,3602.36 R17.1@2108.27,3606.3
  Bottom w12: 1306.53,2857.72 1429.69,2980.87 ; 1447.36,2988.19 1497.52,2988.19 ; 1515.2,2995.51 1760.39,3240.71 ; 1767.72,3258.39 v1(1767.72,3559.06)
TEMP: IC4.1 R32.1 X4.1 | length 990.6
  Top w10: IC4.1@3484.45,3182.48 3485.83,3181.1 v1(3515.75,3181.1) ; v1(3551.18,2984.25) 3602.36,2933.07 3763.78,2933.07 3814.96,2881.89 3814.96,2736.22 3771.65,2692.91 X4.1@3673.23,2692.91 ; v1(3555.12,3259.84) 3557.09,3265.75 R32.1@3564.96,3299.21
  Bottom w10: v1(3551.18,2984.25) 3551.18,3145.67 v1(3515.75,3181.1) 3555.12,3220.47 v1(3555.12,3259.84)
TSCL: X1.19
TSDA: X1.18
USB_DN_CON: IC1.5 TP137.P$1 USB1.2 | length 310
  Top w12: v1(2846.46,4074.8) 2862.2,4059.06 IC1.5@2862.2,3988.19 ; USB1.2@2895.67,4204.72 2897.64,4133.86 v1(2901.57,4122.05)
  Bottom w12: v1(2846.46,4074.8) 2850.39,4078.74 2897.64,4122.05 v1(2901.57,4122.05)
  Bottom w16: v1(2901.57,4122.05) 2901.57,4145.67 TP137.P$1@2929.13,4169.29
USB_DP_CON: IC1.4 TP138.P$1 USB1.3 | length 287.5
  Top w12: v1(2846.46,4129.92) 2862.2,4129.92 2870.08,4129.92 ; USB1.3@2870.08,4204.72 2870.08,4129.92 ; IC1.4@2881.89,3988.19 2881.89,4094.49 2870.08,4102.36 2870.08,4129.92
  Bottom w16: v1(2846.46,4129.92) 2850.39,4133.86 TP138.P$1@2850.39,4169.29
VBAT: F2.2 R21.2 T1.3 TP110.P$1 | length 1187
  Top w12: R21.2@3127.95,3429.13 3212.6,3429.13 3216.54,3425.2 ; v1(3212.6,3322.83) 3220.47,3322.83 3236.22,3338.58
  Top w32: F2.2@3236.22,3251.97 3236.22,3338.58 3236.22,3393.7 3216.54,3413.39 3216.54,3417.32 3216.54,3425.2 3216.54,3846.46 3196.85,3866.14 3196.85,3992.13 3196.85,4051.18 3196.85,4074.8 3240.16,4118.11 3342.52,4118.11 T1.3@3358.27,4102.37 ; F2.2@3245.73,3248.03 F2.2@3248.03,3248.03
  Bottom w12: v1(3212.6,3322.83) TP110.P$1@3236.22,3322.83 ; TP110.P$1@3236.22,3322.83 TP110.P$1@3244.09,3322.83 TP110.P$1@3236.22,3322.83
VBAT_SENSE: C16.1 IC3.7 R20.2 R21.1 | length 1726.9
  Top w12: IC3.7@1599.6,3381.1 1599.61,3446.06 1629.92,3476.38 1645.67,3492.13 1791.34,3492.13 1807.09,3492.13 1818.9,3503.94 v1(1854.33,3503.94) ; v1(2149.61,3515.75) 2354.33,3515.75 2370.08,3500 2397.64,3472.44 2401.57,3468.5 2980.32,3468.5 3023.62,3425.2 3057.09,3425.2 R21.1@3061.03,3429.13 R20.2@3061.03,3496.06 C16.1@3061.03,3555.12
  Bottom w12: v1(1854.33,3503.94) 1862.2,3496.06 2129.92,3496.06 v1(2149.61,3515.75)
VCC: C14.1 C15.1 C18.1 D3.C IC2.2 IC2.2@ R2.2 R9.2 T1.2 T2.2 TP129.P$1 | length 1423.4
  Top w24: IC2.2@3477.12,3681.1 3570.87,3681.1 3592.13,3681.1 ; R9.2@3478.35,3883.86 R9.2@3480.32,3883.86
  Top w32: R9.2@3480.32,3883.86 3478.35,3885.83 3444.88,3885.83 3403.54,3927.17 3403.54,4011.81 T1.2@3395.67,4019.69 3395.67,4053.15 3444.88,4102.36 T2.2@3466.54,4098.43 3513.78,4149.61 3889.76,4149.61 3905.51,4133.86 R2.2@3942.92,4133.86
  Top w40: C14.1@3326.77,3659.45 3393.7,3659.45 C15.1@3397.64,3655.51 ; C18.1@3397.64,3572.83 C15.1@3397.64,3655.51 ; IC2.2@3477.12,3681.1 3452.76,3681.1 3427.17,3655.51 C15.1@3397.64,3655.51 ; R9.2@3480.32,3883.86 3480.32,3838.58 3570.87,3748.03 v1(3570.87,3744.09) 3570.87,3681.1
  other v1: 3570.87,3622.05 3622.05,3622.05 3728.35,3677.17 3807.09,3677.17 3885.83,3677.17 3964.57,3677.17 3688.98,3716.54 3767.72,3716.54 3846.46,3716.54 3925.2,3716.54 4003.94,3716.54 3610.24,3744.09 3649.61,3755.91 3728.35,3755.91 3807.09,3755.91 3885.83,3755.91 3964.57,3755.91 3570.87,3795.28 3610.24,3795.28 3688.98,3795.28 3767.72,3795.28 3846.46,3795.28 3925.2,3795.28 4003.94,3795.28
VCOM: C38.2 X1.1 | length 146
  Top w10: C38.2@4033.46,3066.93 4066.93,3066.93 4120.08,3120.08 X1.1@4157.48,3120.08
VDD: C8.1 IC1.6 R3.2 R12.2 R13.1 R14.2 | length 1405.7
  Top w12: R12.2@2657.48,3816.93 2661.42,3818.9 v1(2692.91,3818.9) R13.1@2724.41,3816.93 ; v1(2795.28,4019.69) 2795.28,4043.31 C8.1@2799.21,4043.31 ; C8.1@2795.28,4053.15 C8.1@2799.21,4043.31 ; IC1.6@2842.52,3988.19 2842.52,4023.62 2822.83,4043.31 C8.1@2799.21,4043.31 ; v1(3031.5,4019.69) R3.2@3084.65,3992.13 ; v1(3039.37,3799.21) R14.2@3084.65,3799.21
  Bottom w12: v1(2795.28,4019.69) 2759.84,4019.69 2692.91,3948.82 v1(2692.91,3818.9) 2692.91,3787.4 2751.97,3728.35 2842.52,3728.35 2988.19,3874.02 2988.19,3909.45 3000,3921.26 3000,3988.19 v1(3031.5,4019.69) 3086.61,3972.44 3086.61,3838.58 3047.24,3799.21 v1(3039.37,3799.21)
VGH: C21.2 X1.20 | length 142.8
  Top w12: C21.2@4033.46,3448.82 4062.99,3448.82 4108.27,3494.09 X1.20@4157.48,3494.1
VGL: C19.2 X1.21 | length 133.6
  Top w10: C19.2@4027.56,3515.75 C19.2@4033.46,3519.69
  Top w12: C19.2@4033.46,3519.69 4039.37,3513.78 X1.21@4157.48,3513.78
VIBRATOR: R11.1 T4.3 U1.15 | length 3996.5
  Top w10: U1.15@2632.55,2007.11 2661.25,2035.8 v1(2661.25,2081.87) ; v1(2988.19,2704.72) 2988.19,2646.18 3038.75,2595.62 3038.75,2565.62 v1(3037.5,2564.37)
  Top w12: T4.3@3787.25,4019.37 3787.25,3946.5 R11.1@3786.09,3945.33 3786.08,3922.58 3846.46,3862.2 4027.56,3862.2 4086.61,3803.15 4086.61,3685.04 v1(4153.54,3618.11) ; v1(4287.4,3362.2) 4342.52,3417.32 v1(4342.52,3511.81)
  Bottom w10: v1(2661.25,2081.87) 2661.25,2488.12 2742.5,2569.37 3021.25,2569.37 ; 3021.25,2569.37 3032.5,2569.37 v1(3037.5,2564.37) 3026.25,2564.37 3021.25,2569.37
  Bottom w12: v1(2988.19,2704.72) 2996.06,2712.6 3996.06,2712.6 4094.49,2811.02 4094.49,3051.18 4118.11,3074.8 4161.42,3074.8 4251.97,3165.35 4251.97,3326.77 v1(4287.4,3362.2) ; v1(4153.54,3618.11) 4153.54,3551.18 4173.23,3531.5 4322.83,3531.5 v1(4342.52,3511.81)
VPP: X1.6
VSH: C33.2 X1.5 | length 140.7
  Top w10: C33.2@4043.31,3200.79 C33.2@4033.46,3208.66 4043.31,3198.82 X1.5@4157.48,3198.82
VSL: C35.2 X1.3 | length 132.5
  Top w10: C35.2@4033.46,3137.8 4039.37,3141.73 4074.8,3141.73 4092.52,3159.45 X1.3@4157.48,3159.45
VSS: 
VUSB_SENSE: C10.1 IC3.6 R6.2 R7.1 | length 1566.8
  Top w12: IC3.6@1549.6,3381.1 1549.61,3427.56 1633.86,3511.81 1791.34,3511.81 1811.02,3531.5 v1(1877.95,3531.5) ; v1(2145.67,3775.59) 2361.22,3775.59 2428.75,3843.12 2498.75,3843.12 2543.75,3888.12 2543.75,3919.73 R6.2@2568.89,3944.88 R6.2@2562.99,3938.98
  Top w16: C10.1@2568.89,4003.94 R6.2@2568.89,3944.88 R7.1@2631.89,3944.88
  Bottom w12: v1(1877.95,3531.5) 1881.89,3531.5 1897.64,3515.75 2114.17,3515.75 2137.8,3543.31 2137.8,3594.49 2157.48,3618.11 2157.48,3763.78
WS2812_DATA: D105.4 IC3.8 TP136.P$1 | length 1429.4
  Top w16: v1(1641.73,3444.88) 1649.61,3437.01 IC3.8@1649.6,3381.1
  Bottom w12: 1283.46,4090.55 1314.96,4090.55 TP136.P$1@1334.65,4090.55
  Bottom w16: D105.4@1489.09,4291.34 1358.27,4291.34 1338.58,4271.65 1338.58,4220.47 1283.46,4165.35 1283.46,4090.55 1283.46,3539.37 1330.71,3492.13 1594.49,3492.13 v1(1641.73,3444.88)
WS2812_DATA_OUT: D100.2 X3.8 | length 3100.1
  Top w12: X3.8@3020.08,3000 3055.12,3000 v1(3066.93,2988.19) ; v1(3248.03,2685.04) v1(3248.03,2897.64) ; v1(4314.96,3330.71) 4374.02,3389.76 v1(4374.02,3488.19)
  Bottom w12: v1(3066.93,2988.19) 3090.55,2964.57 3090.55,2952.76 3090.55,2948.82 3098.43,2940.94 3196.85,2940.94 v1(3248.03,2897.64) ; v1(3248.03,2685.04) 3255.91,2692.91 4003.94,2692.91 4114.17,2803.15 4114.17,3027.56 4114.17,3035.43 4118.11,3039.37 4133.86,3055.12 4169.29,3055.12 4271.65,3157.48 4271.65,3287.4 v1(4314.96,3330.71) ; D100.2@4251.07,4165.36 4251.06,3672.32 4231.38,3652.64 4177.17,3598.43 4177.17,3562.99 4188.98,3551.18 4346.46,3551.18 4370.08,3527.56 4374.02,3523.62 v1(4374.02,3488.19)
WS2812_POWER: C1.2 C2.2 C3.2 C4.2 C5.2 C6.2 C13.1 D100.1 D101.1 D102.1 D103.1 D104.1 D105.1 T2.3 TP117.P$1 X3.2 | length 6112.5
  Top w12: C2.2@1639.76,4236.22 1639.76,4261.81 v1(1665.35,4291.34) ; v1(2149.61,4291.34) 2149.61,4250 C1.2@2159.44,4240.16 ; C4.2@2643.7,4232.28 2643.7,4265.75 v1(2665.35,4287.4) ; C5.2@3163.38,4232.28 3163.39,4277.56 v1(3173.23,4287.4) ; C13.1@3549.21,3952.76 C13.1@3549.21,3964.57 ; v1@3679.13,4285.43 v1(3685.04,4291.34) ; v1(4173.23,4291.34) 4179.13,4273.62 C6.2@4179.13,4232.28
  Top w16: C13.1@3549.21,3952.76 3549.21,3964.57 C13.1@3555.12,3958.66 ; C3.2@3675.19,4236.22 3675.2,4281.5 v1(3685.04,4291.34)
  Top w32: v2(2370.08,3685.04) v2(2448.82,3763.78) ; v2(2712.6,3318.9) 2720.08,3311.42 X3.2@2720.08,3251.96 ; T2.3@3503.94,4015.75 3543.31,4015.75 ; C13.1@3549.21,3964.57 3549.21,3966.54 3543.31,3972.44 3543.31,4015.75 ; v2(3618.11,4102.36) 3618.11,4098.43 3543.31,4015.75
  Bottom w12: v1(1665.35,4291.34) 1688.98,4291.34 D105.1@1692.01,4291.34 ; v1(2149.61,4291.34) D104.1@2203.82,4291.34 ; 2566.93,3318.9 2566.93,3370.08 2586.61,3389.76 2610.24,3389.76 2618.11,3381.89 TP117.P$1@2673.23,3381.89 ; v1(2665.35,4287.4) 2711.69,4287.4 D103.1@2715.63,4291.34 ; v1(3173.23,4287.4) 3223.5,4287.4 D102.1@3227.44,4291.34 ; v1(3685.04,4291.34) D101.1@3739.25,4291.34 ; v1(4173.23,4291.34) 4208.66,4291.34
  Bottom w32: D105.1@1688.98,4291.34 v1(1665.35,4291.34) 1625.98,4251.97 1625.98,4137.8 1645.67,4118.11 1972.44,4118.11 2051.18,4118.11 2177.17,4240.16 2203.82,4266.81 D104.1@2203.82,4291.34 ; 2299.21,4338.58 2299.21,4295.28 2299.21,4078.74 2429.13,3948.82 2429.13,3783.46 v2(2448.82,3763.78) ; v2(2370.08,3685.04) 2374.02,3681.1 2374.02,3503.94 2413.39,3464.57 2413.39,3429.13 2393.7,3405.51 2393.7,3342.52 2417.32,3318.9 2566.93,3318.9 v2(2712.6,3318.9) ; v2(3618.11,4102.36) 3661.42,4102.36 3681.1,4122.05 ; D101.1@3739.25,4291.34 3736.22,4288.31 3736.22,4251.97 3681.1,4196.85 3681.1,4125.98 3681.1,4122.05 ; D100.1@4251.07,4291.34 4208.66,4291.34 v1(4173.23,4291.34) 4125.98,4244.09 4125.98,4133.86 4114.17,4122.05 3681.1,4122.05
  Bottom w40: D104.1@2203.82,4291.34 2203.82,4306.18 2236.22,4338.58 2299.21,4338.58 2712.6,4338.58 ; D103.1@2715.63,4291.34 2712.6,4294.37 2712.6,4338.58 ; D102.1@3227.44,4291.34 3224.41,4294.37 3224.41,4338.58 ; D101.1@3739.25,4291.34 3736.22,4294.37 3736.22,4338.58 3224.41,4338.58 ; 2712.6,4338.58 3047.24,4338.58 3224.41,4338.58
pads on no net: FD1.1 FD2.1 FD3.1 FD4.1 FD5.1 IC1.1 IC1.2 IC1.10 IC1.11 IC1.12 IC1.13 IC1.14 IC1.15 IC1.16 IC1.17 IC1.18 IC1.19 IC1.20 IC1.21 IC1.22 IC1.23 IC1.27 IC3.32 IC4.6 S1.2 S1.4 S2.2 S2.4 USB1.4 X1.24 X1.25 X1.26 X2.1 X2.8 X3.1@2620.08,3075.98 X3.1@2620.08,3175.98 X3.1@2720.08,3075.98 X3.1@2720.08,3175.98 X3.1@2820.08,3075.98 X3.1@2820.08,3175.98 X3.1@2920.08,3075.98 X3.1@2920.08,3175.98 X3.1@3020.08,3075.98 X3.1@3020.08,3175.98 X3.1@3120.08,3075.98 X3.1@3120.08,3175.98
copper on no net: | length 944.7
  Top w12: 1208.66,2888.19 cw(c1212.46,2884.39) 1212.46,2889.76 ; 1232.2,2844.88 ccw(c1232.2,2850.39) 1237.72,2850.39 ; 1256.04,3061.42 ccw(c1256.04,3066.79) 1259.84,3062.99 ; 1412.48,2974.8 cw(c1412.48,2949.8) 1430.16,2967.48 ; 1794.31,3581.71 cw(c1803.15,3572.87) 1811.99,3581.71 ; 1817.93,3575.77 ccw(c1826.77,3584.61) 1835.61,3575.77 ; 1831.67,3601.4 cw(c1840.51,3610.24) 1831.67,3619.08 ; 1837.62,3577.78 ccw(c1828.79,3586.61) 1837.62,3595.45 ; 1837.62,3625.02 cw(c1846.46,3616.18) 1855.3,3625.02 ; 1861.24,3619.08 ccw(c1870.08,3631.85) 1882.85,3623.01 ; 1877.95,3649.61 cw(c1883.42,3657.58) 1878.5,3665.91 ; 1880.93,3621.08 ccw(c1872.09,3633.86) 1884.86,3642.7 ; 1886.1,3673.5 cw(c1894.95,3664.66) 1894.94,3677.17 ; 1913.94,3760.39 ccw(c1896.26,3778.07) 1921.26,3778.07 ; 1921.26,3926.65 cw(c1946.26,3926.65) 1928.58,3944.33 ; 1933.62,3752.52 ccw(c1915.94,3770.2) 1940.94,3770.2 ; 1940.94,3883.35 cw(c1965.93,3883.34) 1948.27,3901.02 ; 1944.19,3677.17 cw(c1944.19,3664.67) 1956.69,3664.67 ; 1953.31,3969.06 cw(c1970.99,3951.38) 1970.99,3976.38 ; 1956.69,3587.3 ccw(c1969.19,3587.3) 1969.19,3574.8 ; 1963.94,3916.69 cw(c1981.63,3899.01) 1981.62,3924.02 ; 4114.17,3271.65 cw(c4120.08,3271.65) 4120.08,3277.56
  Top w16: 1476.38,3297.24 ccw(c1487.2,3294.28) 1484.25,3283.46 ; 3641.73,3303.15 cw(c3654.53,3310.03) 3647.64,3322.83
  Top w32: 3236.22,3251.97 ccw(c3245.73,3261.48) 3245.73,3248.03
  Bottom w10: 2188.98,4090.55 ccw(c2188.98,4138.44) 2220.47,4102.36
  Bottom w12: 1288.86,2850.39 ccw(c1288.85,2875.38) 1306.53,2857.72 ; 1296.73,2889.76 ccw(c1296.72,2914.77) 1314.41,2897.09 ; 1421.81,3004.49 cw(c1439.49,2986.81) 1439.49,3011.81 ; 1429.69,2980.87 cw(c1447.36,2963.2) 1447.36,2988.19 ; 1489.64,2948.82 ccw(c1489.64,2973.82) 1507.32,2956.14 ; 1489.64,3011.81 ccw(c1489.64,3036.81) 1507.32,3019.13 ; 1497.52,2988.19 ccw(c1497.52,3013.19) 1515.2,2995.51 ; 1501.46,3062.99 ccw(c1501.46,3087.98) 1519.13,3070.31 ; 1697.4,3248.58 ccw(c1679.72,3266.26) 1704.72,3266.26 ; 1728.9,3240.71 ccw(c1711.22,3258.39) 1736.22,3258.39 ; 1760.39,3240.71 ccw(c1742.71,3258.4) 1767.72,3258.39 ; 1795.28,3299.9 ccw(c1807.78,3299.9) 1807.78,3287.4 ; 1795.28,3302.46 cw(c1807.78,3302.46) 1807.78,3314.96 ; 1795.28,3358.96 ccw(c1807.78,3358.96) 1807.78,3346.46 ; 1795.28,3365.45 cw(c1807.78,3365.45) 1807.78,3377.95 ; 1799.49,3248.31 cw(c1808.33,3239.47) 1808.33,3251.97 ; 1830.71,3421.95 ccw(c1843.21,3421.95) 1843.21,3409.45 ; 1830.71,3428.44 cw(c1843.21,3428.44) 1843.21,3440.94 ; 1861.52,3251.97 ccw(c1861.52,3264.47) 1874.02,3264.47 ; 1861.52,3287.4 cw(c1861.52,3274.9) 1874.02,3274.9 ; 1861.52,3314.96 ccw(c1861.52,3327.46) 1874.02,3327.46 ; 1861.52,3346.46 cw(c1861.52,3333.96) 1874.02,3333.96 ; 1889.07,3377.95 ccw(c1889.07,3390.45) 1901.57,3390.45 ; 1889.07,3409.45 cw(c1889.07,3396.95) 1901.57,3396.95 ; 2145.67,3775.59 cw(c2145.67,3763.78) 2157.48,3763.78

## Polygon pours and split planes (outlines as drawn)
no net on tRestrict (solid): 1273.71,3367.58 1277.64,4174.67 1328.83,4225.86 1328.83,4395.76 1084.12,4395.76 982.19,4293.83 982.19,3202.66 1108.79,3202.66
no net on bRestrict (solid): 982.19,3202.66 1108.79,3202.66 1273.72,3367.59 1273.72,4170.74 1328.83,4225.86 1328.83,4395.76 1084.12,4395.76 982.19,4293.83
no net on Bottom Overlay (solid): 3874.02,1936.88 ccw(c3874.02,1826.77) 3763.91,1826.77 ccw(c3874.02,1826.77) 3874.02,1716.66 ccw(c3874.02,1826.77) 3983.99,1832.31 ccw(c3873.95,1826.77) 3877.95,1944.88 3988.82,1952.88 4028.19,1992.25 4354.46,1992.25 4354.46,1661.29 4039.5,1661.29 4039.5,1346.33 3708.54,1346.33 3708.54,1661.29 3393.57,1661.29 3393.57,1992.25 3708.54,1992.25 3708.54,2346.58 4039.5,2346.58 4039.5,1984.88 3991.5,1936.88
GND on Bottom "Bottom-GND" (hatched 90Degree grid 20 track 12, remove dead copper, pour order 0): 4706.79,2620.15 1001.71,2632 1033.37,1393.62 ccw(c1393.7,1393.7) 1393.7,1033.37 4385.83,1033.37 ccw(c4385.83,1356.52) 4706.79,1394.05
GND on Bottom "Bottom-GND 1" (solid, remove dead copper, pour order 2): 4754.03,4228.46 4757.98,2604.21 982.06,2620.01 1017.62,4271.72 cw(c1141.73,4271.65) 1141.73,4395.76 4570.76,4399.7 cw(c4576.77,4222.44)
VCC on Bottom "Bottom-VCC" (solid, remove dead copper, pour order 10): 3519.56,3810.4 3519.56,3575.43 3555.75,3539.24 3897.01,3539.24 4055.24,3697.48 4055.24,3782.84 3999.37,3838.71 3583.29,3838.71 3567.55,3822.96 3532.12,3822.96
GND on Top "Top-GND" (hatched 90Degree grid 20 track 12, remove dead copper, pour order 4): 958.57,2631.99 4777.65,2624.1 4777.65,954.63 958.57,954.63
GND on Top "Top-GND 1" (solid, remove dead copper, pour order 6): 976.97,4407.57 4789.46,4407.57 4789.46,2604.24 950.69,2604.24 950.69,4412.83
VCC on Top "Top-VCC" (solid, remove dead copper, pour order 8): 3629.29,3594.36 3684.41,3649.48 3740.78,3649.48 3760.47,3629.8 3987.56,3629.8 4051.31,3693.54 4051.31,3786.5 4015.4,3826.9 3503.34,3826.9 3485.99,3797.97 3519.56,3764.41 3519.56,3626.61 3551.81,3594.36

## Keep-outs
Keep-Out Layer:
  the board outline again, w10

## Silkscreen, mask and mechanical layers (free items; w line width, h text height)
Top Overlay:
  text "Reset" at 2476.38,3539.37 h34
  text "Flash" at 3039.37,3362.2 h34
  text "https://sha2017.org/" at 1156.67,1263.78 h64.6 r90
Bottom Overlay:
  drawing of 5616 lines, arcs and shapes, not listed
  text "A" at 1133.47,1907.27 h85 r315
  text "B" at 1535.97,1540.3 h85 r315
  text "Start" at 2271.04,1120.19 h85 r315
  text "Select" at 2852.26,1090.15 h85 r315
Dimension:
  lines w0: 4452.76,3661.42 4452.76,3708.66
  lines w3.94: 4452.76,2976.38 4618.11,2976.38 4618.11,3708.66 4452.76,3708.66 4452.76,2976.38
  lines w10: 1000,1393.7 ccw(c1393.7,1393.7) 1393.7,1000 4346.46,1000 ccw(c4346.46,1393.7) 4740.16,1393.7 4740.16,4228.35 ccw(c4582.68,4228.35) 4582.68,4385.83 1157.48,4385.83 ccw(c1157.48,4228.35) 1000,4228.35 1000,1393.7
Top Assembly:
  circle w16: c3000.67,4009.88 r7.87
  circle w16: c4161.42,3940.94 r191.95
  rectangle: 4354.33,3897.64 4437.01,3984.25
  lines w16: 1716.54,1078.74 4019.69,1074.8 4019.69,2637.8 1716.54,2637.8 1716.54,1078.74
  text "-" at 4338.58,4047.24 h59.5
  text "+" at 4444.88,4047.24 h59.5
  text "RX" at 3165.35,4031.5 h20.4
  text "USB" at 2555.12,3795.28 h20.4 r90
  text "TX" at 3165.35,3716.54 h20.4
Bottom Assembly:
  circle w0: c1393.7,2181.1 r200.75
  lines w10: 1295.28,2614.17 4448.82,2614.17 4448.82,4070.87 1295.28,4070.87 1295.28,2614.17
  text "GND" at 1381.89,3992.13 h20.4 r270
  text "GND" at 2866.14,3992.13 h20.4 r270
  text "VUSB_IN" at 2940.94,3909.45 h20.4 r270
  text "ESP32_TX" at 1440.94,3881.89 h20.4 r270
  text "ESP32_RX" at 1496.06,3881.89 h20.4 r270
  text "USB_DP_CON" at 2830.71,3834.65 h20.4 r270
  text "USB_DN_CON" at 2905.51,3834.65 h20.4 r270
  text "SD1" at 1897.64,3826.77 h20.4
  text "WS2812_DATA" at 1322.83,3818.9 h20.4 r270
  text "CD0" at 1897.64,3787.4 h20.4
  text "CLK" at 1897.64,3748.03 h20.4
  text "VCC" at 3980.32,3744.09 h20.4
  text "CND" at 1897.64,3708.66 h20.4
  text "SD3" at 1897.64,3669.29 h20.4
  text "SD2" at 1893.7,3625.98 h20.4
  text "GND" at 1893.7,3586.61 h20.4
  text "GDR" at 3964.57,3586.61 h20.4
  text "RESE" at 3964.57,3551.18 h20.4
  text "WS2812_POWER" at 2665.35,3448.82 h20.4 r270
  text "GND" at 2704.72,3448.82 h20.4 r270
  text "3V3_SWITCHED" at 2744.09,3448.82 h20.4 r270
  text "ESP32_!RESET" at 2779.53,3448.82 h20.4 r270
  text "I2C_SDA" at 2818.9,3448.82 h20.4 r270
  text "ESP32_FLASH" at 2858.27,3448.82 h20.4 r270
  text "I2C_SCL" at 2897.64,3448.82 h20.4 r270
  text "+3V3" at 2940.94,3448.82 h20.4 r270
  text "LCD_BUSY" at 4074.8,3413.39 h20.4
  text "5V" at 3196.85,3385.83 h20.4 r270
  text "VBAT" at 3236.22,3385.83 h20.4 r270
  text "LCD_!RESET" at 4070.87,3374.02 h20.4
  text "LCD_D/!S" at 4070.87,3334.65 h20.4
  text "LCD_CS" at 4070.87,3291.34 h20.4
  text "LCD_SCK" at 4070.87,3251.97 h20.4
  text "PREVGL" at 3708.66,3220.47 h20.4 r270
  text "GND" at 3751.97,3220.47 h20.4 r270
  text "PREVGH" at 3791.34,3220.47 h20.4 r270
  text "LCD_MOSI" at 4070.87,3212.6 h20.4
  text "GND" at 4070.87,3177.17 h20.4
Milling:
  lines w56: 4480.32,3003.94 4590.55,3003.94 4590.55,3681.1 4480.32,3681.1 4480.32,3003.94
Unrouted:
  lines w0: 2389.09,1936.43 2389.49,1934.85 ; 2940.94,2653.54 2948.82,2661.42

## Dimensions
1393.7,1000 to 4346.46,1000 on Document
1393.7,1000 to 2870.35,999.98 on Document

## Text inside footprints (layer, text, board x,y; h text height)
TOUCH_SEL: Assembly Top "Left" at 4390.56,1803.94 h155; Assembly Top "Right" at 3651.58,1789.76 h155; Assembly Top "UP" at 3954.73,2177.56 h155; Assembly Top "DOWN" at 4078.74,1362.2 h155
X3: Document "1" at 2571.65,3234.25 h48.83; Document "6" at 3163.78,3236.61 h48.83; Document "12" at 2545.28,2972.83 h48.83